# Altium PCB USBDM_Kinetis.PcbDoc
Units mil, origin at the board's own origin, x right, y up, seen from the top; angles counter-clockwise.
Board outline 2207.01 x 748.03 mil, 2 copper layers (Top Layer, Bottom Layer); 59 components, 62 nets, 241 pads, 104 vias.
Unrouted connection lines stored in the file: 19.
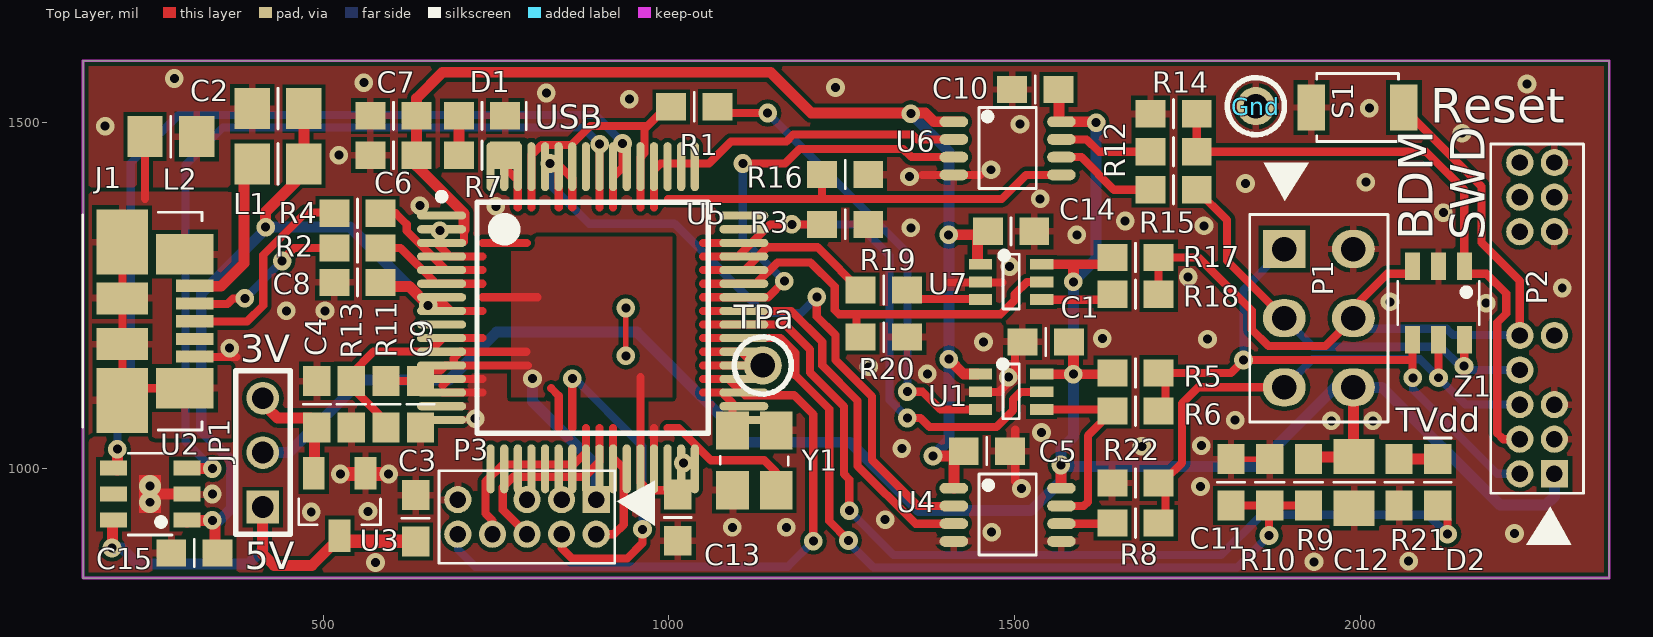
[diagram p0: Top Layer view]
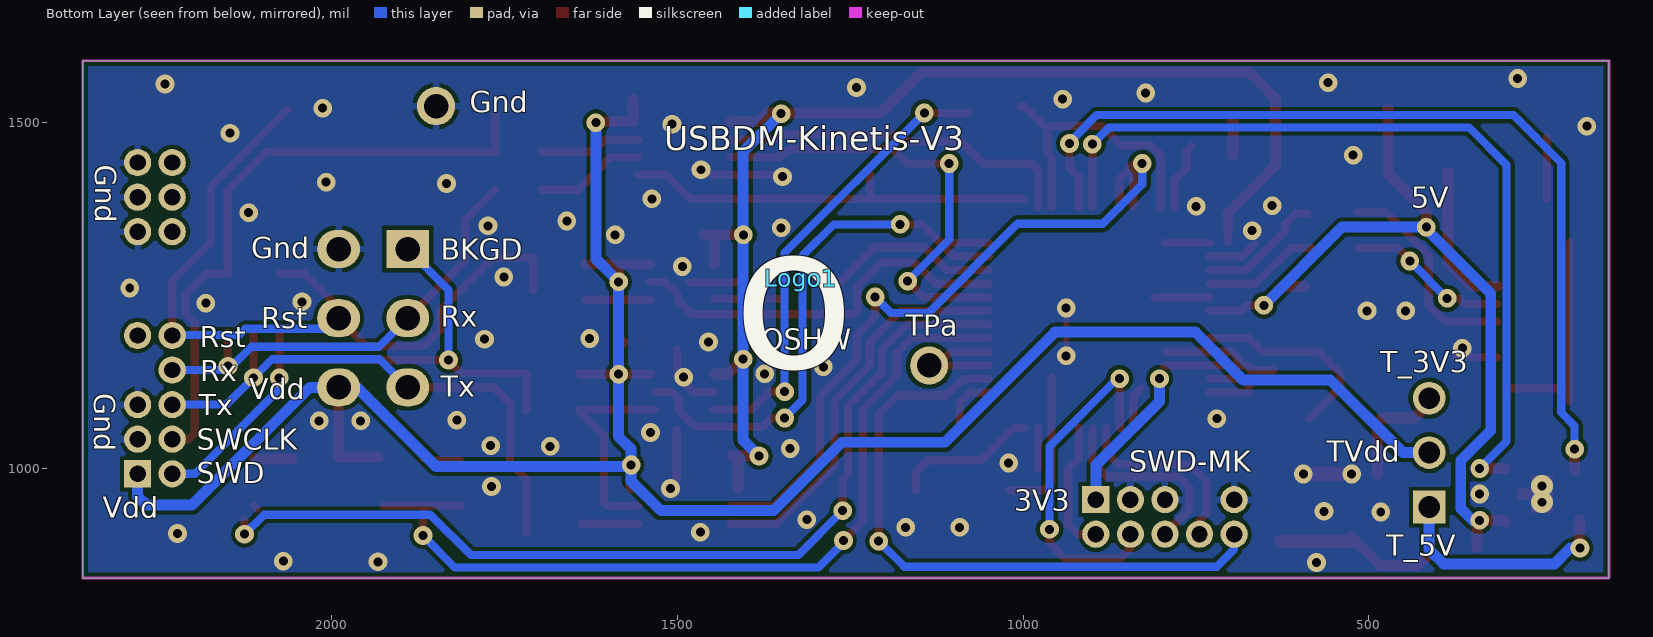
[diagram p1: Bottom Layer view, seen from below]
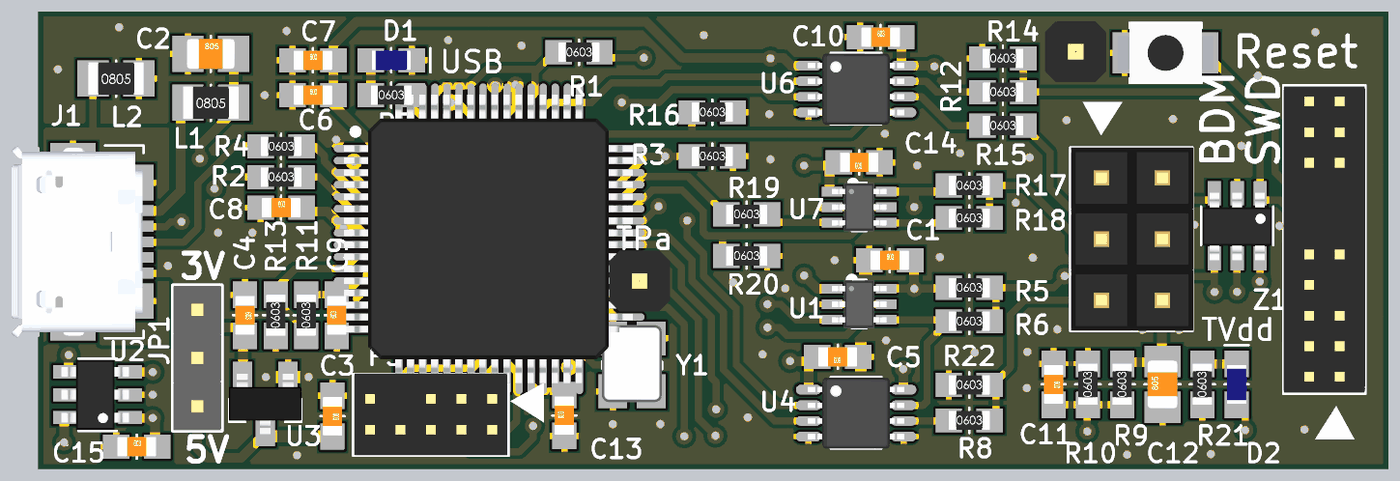
[diagram p2: 3D render of the assembled board from above, using the file's embedded part models]

## Layer stack, top to bottom
Top Solder: solder mask 0.4, Solder Resist, Dk 3.5
Top Layer: signal copper 1.4
Dielectric 1: dielectric 12.6, FR-4, Dk 4.8
Bottom Layer: signal copper 1.4
Bottom Solder: solder mask 0.4, Solder Resist, Dk 3.5

## Board outline
152.99,841.62 2360,841.62 2360,1589.65 152.99,1589.65

## Design rules (kind name [scope] priority, off if disabled: settings)
AssemblyTestPointUsage SilkToBoardRegionClearance_1 [All] p2:
AssemblyTestPointUsage SilkToBoardRegionClearance [All] p3:
Clearance [All] p1: gap=6
HoleSize [All] p1: absolutevalues=TRUE maxlimit=250 minlimit=13 maxpercent=80.000 minpercent=20.000
MatchedLengths DiffPair_DIFF100MatchedLengths [InDifferentialPairClass('DIFF100')] p1: tolerance=6 checknetsindiffpair=TRUE checkdiffpairvsdiffpair=FALSE checkothers=FALSE
MinimumAnnularRing [All] p1: minimumring=7
MinimumSolderMaskSliver [All] p1 off: minsoldermaskwidth=3.94
MinimumSolderMaskSliver SilkscreenOverComponentPads_2 [All] p2 off: minsoldermaskwidth=10
MinimumSolderMaskSliver SilkToSolderMaskClearance_1 [IsPad] p3 off: minsoldermaskwidth=10
MinimumSolderMaskSliver SilkscreenOverComponentPads_1 [All] p4 off: minsoldermaskwidth=10
MinimumSolderMaskSliver SilkToSolderMaskClearance [IsPad] p5 off: minsoldermaskwidth=10
MinimumSolderMaskSliver SilkscreenOverComponentPads [All] p6 off: minsoldermaskwidth=10
PlaneClearance [All] p1: clearance=10
PlaneConnect [All] p1: planeconnectstyle=Relief reliefexpansion=20 reliefentries=4 reliefconductorwidth=10 reliefairgap=6
PolygonConnect PolygonConnect_Via [IsVia] p1: connectstyle=Direct reliefconductorwidth=10 reliefentries=4 polygonreliefangle="90 Angle" airgapwidth=10
PolygonConnect [All] p2: connectstyle=Relief reliefconductorwidth=10 reliefentries=4 polygonreliefangle="90 Angle" airgapwidth=6
RoomDefinition USBDM_Kinetis [InComponentClass('USBDM_Kinetis')] p1: confinementstyle=ConfineIn formatcopy=TRUE lockcomponents=FALSE outline 100,700 2500,700 2500,1700 100,1700
RoutingVias [All] p1: holewidth=12 width=25 viastyle="Through Hole" minholewidth=12 minwidth=25 maxholewidth=28 maxwidth=50
SilkToBoardRegionClearance SilkToBoardRegionClearance_2 [All] p1 off:
SilkToSilkClearance [All] p1 off: silktosilkclearance=10
SilkToSolderMaskClearance SilkToSolderMaskClearance_2 [IsPad] p1 off: minsilkscreentomaskgap=10 clearancetoexposedcopper=TRUE
SolderMaskExpansion [All] p1: expansion=4
Width [All] p1: maxlimit=100 minlimit=6 preferedwidth=10
23 further rules are at their usual default settings.

## Components (designator, comment, footprint, x,y, rotation, side; value= is the part's Value field where it differs from the comment)
C1 "100nF" CCNP1608-0603 1545,1183 r0 top
C2 "10uF/10V" CCNP2012-0805 435,1520.46 r0 top
C3 "1uF" CCNP1608-0603 634,928 r270 top
C4 "4u7/6V" CCNP1608-0603 491,1093 r270 top
C5 "100nF" CCNP1608-0603 1460,1025 r180 top
C6 "2u2F" CCNP1608-0603 602,1453 r0 top
C7 "100nF" CCNP1608-0603 602,1510 r0 top
C8 "100nF" CCNP1608-0603 550,1269 r0 top
C9 "100nF" CCNP1608-0603 641,1093 r90 top
C10 "100nF" CCNP1608-0603 1530,1548 r0 top
C11 "100nF" CCNP1608-0603 1813,980 r270 top
C12 "4u7F/16V" CCNP2012-0805 1991,980 r90 top
C13 "100nF" CCNP1608-0603 1013,929 r90 top
C14 "100nF" CCNP1608-0603 1495,1343 r180 top
C15 "1uF" CCNP1608-0603 314,878 r0 top
D1 "LED Green" CD1608-0603 730,1510 r0 top
D2 "LED Red" CD1608-0603 2112,980 r90 top
Gnd "TP" "PCBPIN - 0.9mm" 1849,1524 r0 top
J1 "USB_MICRO_B_CONNECTOR" "MOLEX - 47346-0001" 262,1213 r0 top
JP1 "Header 1x3 2mm" "HEADER 1X3 (2MM)" 413,1023 r180 top
L1 "FB" CR2012-0805 435,1440.46 r0 top
L2 "FB" CR2012-0805 280,1480 r0 top
Logo1 "OSHW Logo" OSHW 1322,1275 r180 bottom
P1 "BDM2X3" BDM 1890,1317.37 r270 top
P2 "SWD-2x10" "SWD-2X10 - REDUCED" 2280.63,992.37 r90 top
P3 "SWD2X5" SWD-2X5 895,955 r180 top
R1 "1K" CR1608-0603 1037,1523 r0 top
R2 "33R" CR1608-0603 550,1319 r0 top
R3 "2K2" CR1608-0603 1255,1353 r0 top
R4 "33R" CR1608-0603 550,1369 r0 top
R5 "100K" CR1608-0603 1675,1138 r0 top
R6 "47R" CR1608-0603 1675,1083 r0 top
R7 "470R" CR1608-0603 730,1453 r0 top
R8 "47R" CR1608-0603 1675,921 r0 top
R9 "10K" CR1608-0603 1925,980 r90 top
R10 "10K" CR1608-0603 1869,980 r90 top
R11 "100K" CR1608-0603 591,1093 r90 top
R12 "47R" CR1608-0603 1730,1458 r0 top
R13 "0R" CR1608-0603 541,1093 r90 top
R14 "100K" CR1608-0603 1730,1513 r0 top
R15 "47R" CR1608-0603 1730,1403 r0 top
R16 "2K2" CR1608-0603 1255,1425 r0 top
R17 "100K" CR1608-0603 1675,1305.01 r0 top
R18 "47R" CR1608-0603 1675,1252 r0 top
R19 "1K" CR1608-0603 1311,1258 r0 top
R20 "2K2" CR1608-0603 1311,1190 r0 top
R21 "470R" CR1608-0603 2056,980 r90 top
R22 "100K" CR1608-0603 1675,979 r0 top
S1 "SW-PB-SMT-B3U" SW_SMT_PB2-B3U 1996,1522 r0 top
TPa "TP" "PCBPIN - 0.9mm" 1136,1149 r0 top
U1 "74LVC1T45DCK" SC70_N 1495,1111 r0 top
U2 "MIC2005-0.5YM6-TR" SOT23-6-Power 250,963 r90 top
U3 "MCP1703T-3302E/CB" SOT23 524,948 r180 top
U4 "74LVC2T45DCT" SSOP8_N 1490,933 r0 top
U5 "MK22FN1M0VLH12" TSQFP50P1200X1200-64N 890,1218 r0 top
U6 "74LVC2T45DCT" SSOP8_N 1490,1463 r0 top
U7 "74LVC1T45DCK" SC70_N 1495,1269.72 r0 top
Y1 "XTAL_SMT2_FA-238" "CRYSTAL_SMT - EPSON-FA-238" 1123.75,1011.87 r90 top
Z1 "82402305" SOT23-6 2113,1239.22 r180 top

## Footprints (in the part's own frame and the unit in brackets; to place one, negate y for a bottom-side part, rotate by r counter-clockwise, add the part's x,y. Pads: shape width x height; smd on the part's side, far side on the other; paste and mask are expansions set on the pad)
BDM [mil] "HCS12 style BDM connector"
  rect 55x62 hole 35.43: 1(0,0)
  oval 55x62 hole 35.43: 2(0,100) 3(100,0) 4(100,100) 5(200,0) 6(200,100)
  silkscreen extent -124,-50 250,150, body extent -50,-49 250,151, height 333
CCNP1608-0603 [mm]
  rect 1.1x1 smd: 1(-0.85,0) 2(0.85,0)
  silkscreen extent 0,-0.5 0,0.5, body extent -0.8,-0.4 0.8,0.4, height 0.3
CCNP2012-0805 [mm]
  rect 1.3x1.5 smd: 1(-0.95,0) 2(0.95,0)
  silkscreen extent 0,-0.75 0,0.75, body extent -1,-0.62 1,0.63, height 0.78
CD1608-0603 [mm]
  rect 1.1x1 smd: A(-0.85,0) K(0.85,0)
  silkscreen extent 0,-0.5 1.62,0.5, body extent -0.8,-0.4 0.8,0.4, height 0.8
CR1608-0603 [mm]
  rect 1.1x1 smd: 1(-0.85,0) 2(0.85,0)
  silkscreen extent 0,-0.53 0,0.53, body extent -0.85,-0.4 0.85,0.4, height 0.56
CR2012-0805 [mm]
  rect 1.3x1.5 smd: 1(-0.95,0) 2(0.95,0)
  silkscreen extent 0,-0.75 0,0.75, body extent -1.15,-0.67 1.15,0.68, height 0.76
"CRYSTAL_SMT - EPSON-FA-238" [mm] "Crystal SMT low profile 3.2 x 2.5"
  rect 1.4x1.2 smd: 1(-1.1,-0.8) 2(1.1,-0.8) 3(1.1,0.8) 4(-1.1,0.8)
  silkscreen extent -0.17,-1.25 0.15,1.25, body extent -1.55,-1.24 1.65,1.26, height 0.7
"HEADER 1X3 (2MM)" [mm]
  rect 1.2x1.2 hole 0.8: 1(0,2)
  round 1.2 hole 0.8: 2(0,0) 3(0,-2)
  silkscreen extent -1,-3 1,3, body extent -1,-3 1,3, height 5
"MOLEX - 47346-0001" [mm] "RECEPTACLE, MICRO USB B, BOTTOM MOUNT"
  rect 1.38x0.45 smd: D+(1.33,0) D-(1.33,0.65) G(1.33,-1.3) ID(1.33,-0.65) Vbus(1.33,1.3)
  rect 1.9x2.38 smd: S1(-1.33,2.91) S4(-1.33,-2.91)
  rect 1.9x1.18 smd: S2(-1.33,0.838) S3(-1.33,-0.838)
  rect 2.1x1.48 smd: S5(0.97,2.46) S6(0.97,-2.46)
  silkscreen extent -2.78,-4 1.6,4, body extent -3.88,-3.99 1.55,3.99, height 2.67
OSHW [mil] "OSHW Logo"
"PCBPIN - 0.9mm" [mm]
  round 1.4 hole 0.9: 1(0,0)
  silkscreen extent -1.05,-1.05 1.05,1.05, body extent -1.27,-1.27 1.27,1.27, height 6
SC70_N [mm] "SC70, 6-Leads, Body 2.15x1.4mm, Pitch 0.65mm, IPC Medium Density"
  rect 0.85x0.4 smd: 1(-1.125,0.65) 2(-1.125,0) 3(-1.125,-0.65) 4(1.125,-0.65) 5(1.125,0) 6(1.125,0.65)
  silkscreen extent -0.43,-0.99 0.3,1.14, body extent -1.14,-1 1.14,1, height 1.1
SOT23 [mm] "SOT-23; 3 Leads; Body 3.0 x 2.3 mm, inc. leads (LxW max)"
  rect 0.8x1.2 smd: 1(-0.95,-1.15) 2(0.95,-1.15) 3(0,1.15)
  silkscreen extent -1.5,-0.2 1.5,0.75, body extent -1.5,-1.25 1.5,1.25, height 1.05
SOT23-6 [mm] "SOT-23; 6 Leads; Body 3.0 x 2.3 mm, inc. leads (LxW max)"
  rect 0.55x1 smd: 1(-0.95,-1.35) 2(0,-1.35) 3(0.95,-1.35) 4(0.95,1.35) 5(0,1.35) 6(-0.95,1.35)
  silkscreen extent -1.5,-0.8 1.5,0.8, body extent -1.45,-1.37 1.45,1.43, height 1.45
SOT23-6-Power [mm]
  rect 0.55x1 smd: 1(-0.95,-1.35) 2(0,-1.35) 3(0.95,-1.35) 4(0.95,1.35) 5(0,1.35) 6(-0.95,1.35)
  Top Layer region: 0.7,-0.4 0.7,0.4 -0.7,0.4 -0.7,-0.4
  Top Layer region: -0.2,-0.9 0.2,-0.9 0.2,0.1 -0.2,0.1
  silkscreen extent -1.5,-0.8 1.5,0.8, body extent -1.45,-1.3 1.45,1.5, height 1.45
SSOP8_N [mm] "SSOP, 8-Leads, Body 2.9x3.2mm, Pitch 0.65mm, IPC Medium Density"
  oval 1.05x0.4 smd: 1(-1.975,0.975) 2(-1.975,0.325) 3(-1.975,-0.325) 4(-1.975,-0.975) 5(1.975,-0.975) 6(1.975,-0.325) 7(1.975,0.325) 8(1.975,0.975)
  silkscreen extent -1.05,-1.47 1.05,1.5, body extent -2.01,-1.47 2.01,1.48, height 1.3
SW_SMT_PB2-B3U [mm] "Miniature SMT Push Button"
  rect 1x1.7 smd: 1(-1.7,0) 2(1.7,0)
  silkscreen extent -1.5,-1.25 1.5,1.25, body extent -2,-1.25 2,1.25, height 1.6
SWD-2X5 [mm] "Connector; SWD; 2x5 Position"
  rect 1x1 hole 0.6: 1(0,0)
  round 1 hole 0.6: 2(0,1.27) 3(1.27,0) 4(1.27,1.27) 5(2.54,0) 6(2.54,1.27) 8(3.81,1.27) 9(5.08,0) 10(5.08,1.27)
  silkscreen extent -2.15,-1.06 5.77,2.33, body extent -0.63,-1.09 5.72,2.31, height 4.5
"SWD-2X10 - REDUCED" [mm] "Connector; SWD; 2x10 Position"
  rect 1x1 hole 0.6: 1(0,0)
  round 1 hole 0.6: 2(0,1.27) 3(1.27,0) 4(1.27,1.27) 5(2.54,0) 6(2.54,1.27) 8(3.81,1.27) 9(5.08,0) 10(5.08,1.27) 15(8.89,0) 16(8.89,1.27) 17(10.16,0) 18(10.16,1.27) 19(11.43,0) 20(11.43,1.27)
  silkscreen extent -2.6,-1.07 12.12,2.34, body extent -0.64,-1.06 12.06,2.34, height 4.5
TSQFP50P1200X1200-64N [mm] "Thin QFP, 64-Leads, Body 10x10mm, Pitch 0.5mm, IPC Medium Density"
  oval 1.8x0.3 smd: 1(-5.55,3.75) 2(-5.55,3.25) 3(-5.55,2.75) 4(-5.55,2.25) 5(-5.55,1.75) 6(-5.55,1.25) 7(-5.55,0.75) 8(-5.55,0.25) 9(-5.55,-0.25) 10(-5.55,-0.75) 11(-5.55,-1.25) 12(-5.55,-1.75) 13(-5.55,-2.25) 14(-5.55,-2.75) 15(-5.55,-3.25) 16(-5.55,-3.75) 33(5.55,-3.75) 34(5.55,-3.25) 35(5.55,-2.75) 36(5.55,-2.25) 37(5.55,-1.75) 38(5.55,-1.25) 39(5.55,-0.75) 40(5.55,-0.25) 41(5.55,0.25) 42(5.55,0.75) 43(5.55,1.25) 44(5.55,1.75) 45(5.55,2.25) 46(5.55,2.75) 47(5.55,3.25) 48(5.55,3.75)
  oval 0.3x1.8 smd: 17(-3.75,-5.55) 18(-3.25,-5.55) 19(-2.75,-5.55) 20(-2.25,-5.55) 21(-1.75,-5.55) 22(-1.25,-5.55) 23(-0.75,-5.55) 24(-0.25,-5.55) 25(0.25,-5.55) 26(0.75,-5.55) 27(1.25,-5.55) 28(1.75,-5.55) 29(2.25,-5.55) 30(2.75,-5.55) 31(3.25,-5.55) 32(3.75,-5.55) 49(3.75,5.55) 50(3.25,5.55) 51(2.75,5.55) 52(2.25,5.55) 53(1.75,5.55) 54(1.25,5.55) 55(0.75,5.55) 56(0.25,5.55) 57(-0.25,5.55) 58(-0.75,5.55) 59(-1.25,5.55) 60(-1.75,5.55) 61(-2.25,5.55) 62(-2.75,5.55) 63(-3.25,5.55) 64(-3.75,5.55)
  silkscreen extent -5.67,-4.25 4.25,4.57, body extent -6.02,-6 5.98,6, height 1.6

## Part data
C1 C5 C7 C8 C9 C10 C11 C13 C14: library part Cap, "Capacitor"
C2 C12: library part Cap_CCNP_0805, "Capacitor SMT 0805"
C3 C15: library part Cap, "Capacitor SMT"
C4 C6: library part Cap_CCNP_0603, "Capacitor SMT 0603"
D1 D2: library part "LED SMT,Red-0603", "LED (Red 0603)"
Gnd TPa: "Test Point"
J1: "USB Micro-B Connector"
JP1: "Header, 1x3, 2mm"
L1 L2: library part "Ferrite Bead 0805", "Ferrite Bead (0805) 0.045OHM, 2A"
P2: library part SWD2X10-Reduced, "SWD Connector 2x10-Pin"
P3: "SWD Connector 2x5-Pin"
R1 R3 R5 R6 R7 R8 R9 R10 R12 R14 R15 R16 R17 R18 R19 R20 R21 R22: library part Res, "Resistor SMT"
R2 R4: library part Res, "Resistor"
R11 R13: library part Res_CR0603, "Resistor"
S1: "Switch OMRON B3U series"
U1 U4 U6 U7: "Dual voltage bidirection buffer"
U2: "Power Switch"
U3: "3V3 LDO regulator"
U5: "Arm Cortex M4F"
Y1: "Crystal (EPSON  Q22FA23800065 FA-238 24 MHZ 12.0PF)"
Z1: "Quintuple Unipolar Protection Device (5V)"

## Via types
v1: diameter 27, hole 13, Top Layer to Bottom Layer, tented both sides, 101 vias
v2: diameter 31.5, hole 13, Top Layer to Bottom Layer, tented both sides, 2 vias
v3: diameter 27, hole 13, Top Layer to Bottom Layer, tented top, 1 vias

## Nets (pads, with @x,y where several pads share a name; then routed paths per layer and width w, separated by ;. In a path a pad name is that pad's centre, name@x,y a point inside that pad or via, vN(x,y) a via of type N, cw(c..) or ccw(c..) an arc to the next point about the centre after c; other vN are vias at no path point)
3V3: C5.2 C6.2 C7.2 C9.2 C13.2 C14.2 P3.1 R11.2 U1.1 U4.1 U5.3 U5.7 U5.13 U5.14 U5.21 U5.30 U6.1 U7.1 | length 2666.6
  Top Layer w11.81: R11.2 C9.2 ; C9.2@638,1142 670,1142 677.1,1149.1 689.1,1149.1 ; U5.3@704,1328 704,1345 ; 730.55,1247.53 810,1247.53 ; 794,1168.79 698.79,1168.79 689.1,1159.1 689.1,1149.1 ; 796.1,1149.1 730.55,1149.1 689.1,1149.1 ; 958.9,1131.9 958.9,1058.55 958.9,979.86 970.29,968.47 C13.2@1020.68,968.47
  Top Layer w15.75: 704,1345 704,1369 635.46,1437.54 C6.2 C7.2 635.46,1535.46 673,1573 1147,1573 1206,1514 1370.91,1514 1383.52,1501.39 U6.1@1423.07,1501.39 ; v1(1382,1018) C5.2@1421.54,1018 ; v1@1404.85,1338 C14.2@1461.54,1338 ; v1(1405,1158) 1426.61,1136.39 U1.1@1446.69,1136.39 ; U4.1 C5.2@1412.24,1016.46 ; U7.1@1446.69,1296.39 C14.2@1446.69,1334
  Bottom Layer w15.75: v1(803,1130) 803,1097 895,1005 P3.1 ; v1(1350,1513) 1405,1458 v1(1405,1158) 1405,1041 v1(1382,1018)
  other v1: 1404.85,1337.85
5V: C2.2 C8.2 C15.2 L1.2 U2.1 U5.8 | length 1204
  Top Layer w11.81: v1(652,1236) 677,1236 685.16,1227.84 730.55,1227.84
  Top Layer w15.75: U2.1@303.15,922.6 305.55,925 v1(340,925) 341.28,925 343.68,922.6 C15.2@343.68,885.79 ; v3(417,1349) 417,1371 472.4,1426.4 L1.2 C2.2 ; C8.2@593.46,1263 625,1263 v1(652,1236)
  Bottom Layer w15.75: v1(340,925) 350,925 367.37,942.37 367.37,1011.34 324,1054.71 324,1253 v3@418.5,1347.5 ; v3(417,1349) 539,1349 v1(652,1236)
ADC0_DP0: U5.9
ADC1_DP0: U5.11 U5.12
BKGD/SWD_DIR: R3.1 U1.5 U5.45 U5.46 | length 891.3
  Top Layer w11.81: 1049.45,1306.58 1100.21,1306.58 U5.46@1119.89,1326.27 ; 1049.45,1326.27 U5.46@1119.89,1326.27 ; R3.1 1146.62,1353 U5.46@1119.89,1326.27 ; v1(1345,1073) 1363.95,1073 1377,1059.95 1473.95,1059.95 1497.64,1083.64 1497.64,1099.63 1508.81,1110.8 U1.5@1533.31,1110.8
  Bottom Layer w11.81: v1(1178,1353) 1274,1353 1319,1308 1319,1099 v1(1345,1073)
BKGD/SWD_I: U4.2 U5.60 U5.61 | length 1060
  Top Layer w11.81: 840.79,1377.45 840.79,1439.21 860.47,1419.53 860.47,1377.45 ; v1(1214,1248) 1214,1220 1241,1193 1241,1157 1294,1104 1294,1012 1360.2,945.8 U4.2@1423.07,945.8
  Bottom Layer w11.81: v1(828,1441) 828,1410.83 884.83,1354 1008,1354 1137,1225 1191,1225 v1(1214,1248)
BKGD/SWD_O: R1.1 U5.51 U5.63 | length 429.2
  Top Layer w11.81: 801.42,1377.45 801.42,1453.42 816,1468 859,1468 886.41,1495.41 969.3,1495.41 ; 958.9,1377.45 958.9,1449.9 965,1456 965,1491.1 996.9,1523 R1.1
DAC_OUT: U5.18
DBG_RX: U4.3 U5.39 | length 576.1
  Top Layer w11.81: 1049.45,1227.84 1177.16,1227.84 1222,1183 1222,1149 1273,1098 1273,1003.83 1356.63,920.2 U4.3@1423.07,920.2
DBG_TX: U5.40 U6.3 | length 651.8
  Top Layer w11.81: 1049.45,1247.53 1143.53,1247.53 v1(1167,1271) ; v1(1107,1441) 1168,1441 1189,1462 1339,1462 1350.8,1450.2 U6.3 U6.3@1423.07,1450.2
  Bottom Layer w11.81: v1(1107,1441) 1107,1331 v1(1167,1271)
EXTAL: U5.33 Y1.3 | length 82.5
  Top Layer w11.81: 1049.45,1109.73 1077.27,1109.73 1092.25,1094.75 Y1.3@1092.25,1061.28
EXTAL32: U5.20
GND: C1.1 C2.1 C3.1 C4.1 C5.1 C6.1 C7.1 C8.1 C9.1 C10.1 C11.1 C12.1 C13.1 C14.1 C15.1 D1.K Gnd.1 J1.G L2.2 P1.2 P2.3 P2.5 P2.15 P2.17 P2.19 P3.3 P3.5 P3.9 R3.2 R10.2 R13.1 R14.1 R16.2 R20.2 R21.1 R22.1 S1.1 U1.2 U2.2 U3.1 U4.4 U4.5 U5.4 U5.15 U5.16 U5.31 U6.4 U7.2 Y1.2 Y1.4 Z1.2 | length 840.1
  Top Layer w7.87: v1(938,1163) v1(938,1232) ; C11.1 R10.2
  Top Layer w11.81: J1.G@314.72,1161.19 375,1161.19 ; 666,1324 683.42,1306.58 730.55,1306.58 ; 673,1120 677.19,1124.19 677.38,1124.19 682.61,1129.42 730.55,1129.42 ; 673.73,1109.73 730.55,1109.73 ; 978.58,1000 978.58,1058.55 ; 1366.61,1424.61 1451,1424.61 ; 1405.02,1269.08 1482.82,1269.08 ; U1.2@1446.69,1110.8 1477.8,1110.8 1500.72,1133.72 1500.72,1144.2 ; 1500.74,1144.22 C1.1@1500.74,1172.2 ; v1@1501,981 1501,1056
  Top Layer w19.68: v1(525,992) v1@592,992
  other v1: 576,864 1933,865 2070,866 2223,906 1467,908 1092,915 1170,915 1313,926 483,937 565,938 340,963 1510,971 1769,974 595,992 1021,1008 1337,1029 1684,1032 1770,1033 1539,1052 1958,1069 2018,1069 1819,1070 720,1072 1491,1132 1374,1137 1289,1147 365,1174 1455,1183 1779,1187 1627,1188 447,1228 503,1228 2182,1239 2043,1241 2292,1261 1751,1277 1493,1292 1590,1338 669,1344 1350,1348 1774,1351 1660,1358 2120,1370 750,1379 640,1380 1537,1390 1834,1412 2008,1414 1348,1422 1466,1432 523,1453 2147,1485 185,1495 1508,1498 2013,1521 943,1534 823,1543 1241,1551 2241,1556 559,1558 285,1564
  other v2: 250,951.19 250,974.81
ID: R11.1 R13.2 U5.10 | length 294.6
  Top Layer w11.81: R11.1@586.56,1072.15 541,1117.71 R13.2 541,1137 573,1169 654.06,1169 673.53,1188.47 730.55,1188.47
LED: D2.A U5.38 | length 1380.1
  Top Layer w11.81: 1049.45,1208.16 1167.84,1208.16 1204,1172 1204,1139 1253.19,1089.81 1253.19,991.81 1261,984 v1(1261,939) ; D2.A@2108,942.54 D2.A ; v1(2126,905) D2.A@2126,926
  Bottom Layer w11.81: v1(1261,939) 1325.19,874.81 1798.81,874.81 1857,933 2098,933 v1(2126,905)
NetD1_A: D1.A R7.1 | length 57
  Top Layer w15.75: R7.1 D1.A
NetD2_K: D2.K R21.2 | length 56
  Top Layer w15.75: R21.2 D2.K
NetJ1_D+: J1.D+ R4.1 | length 309.8
  Top Layer w11.81: J1.D+@314.72,1212.37 390.37,1212.37 413.59,1235.59 413.59,1308.52 475.07,1370 R4.1@516.54,1370
NetJ1_D-: J1.D- R2.1 | length 239.4
  Top Layer w11.81: J1.D-@314.72,1237.96 362,1237.96 370.04,1246 v1(387,1246) ; v1(441,1300) 439,1300 458,1319 R2.1
  Bottom Layer w11.81: v1(387,1246) v1(441,1300)
NetJ1_VBUS: J1.Vbus L1.1 | length 217.1
  Top Layer w15.75: J1.Vbus@314.72,1263.55 352.7,1263.55 378,1288.85 386,1296.85 L1.1@386,1428.87
NetR1_2: R1.2 U1.3 | length 662.6
  Top Layer w11.81: R1.2@1079.46,1514 v1(1143,1514) ; v1(1345,1111) 1367,1111 1392.8,1085.2 U1.3@1446.69,1085.2
  Bottom Layer w11.81: v1(1143,1514) 1345,1312 v1(1345,1111)
NetR6_1: R6.1 U1.4 U4.7 | length 305.7
  Top Layer w11.81: U1.4@1533.31,1085.2 R6.1@1641.54,1085.2 ; U4.7@1556.93,945.8 1600,945.8 1606,951.8 1606,1047.46 R6.1
NetR8_1: R8.1 U4.6 | length 82.4
  Top Layer w11.81: U4.6@1556.93,920.2 R8.1@1639.33,920.2
NetR12_1: R12.1 U6.7 | length 147
  Top Layer w11.81: U6.7@1556.93,1475.8 1604.2,1475.8 1622,1458 R12.1
NetR15_1: R15.1 U6.6 | length 159.2
  Top Layer w11.81: U6.6@1556.93,1450.2 1596.8,1450.2 1644,1403 R15.1
NetR18_1: R18.1 U7.4 | length 94.4
  Top Layer w11.81: U7.4 R18.1@1633.66,1244.13
NetR19_2: R19.2 U7.3 | length 101.7
  Top Layer w11.81: R19.2@1345,1245.2 U7.3@1446.69,1245.2
PTA4: U5.26
PTA5: U5.27
PTA12: U5.28
PTA13: U5.29
PTC7: U5.52
PTD2: U5.59
PTD5: U5.62
RESETB: P3.10 U5.34 | length 925.5
  Top Layer w11.81: 1049.45,1129.42 1086.58,1129.42 1110,1106 1181,1106 1209,1078 v1(1209,895)
  Bottom Layer w11.81: P3.10 695,883 720,858 1172,858 v1(1209,895)
RST_DIR: R20.1 U5.43 U7.5 | length 606.6
  Top Layer w11.81: 1049.45,1267.21 1126.21,1267.21 1157,1298 1205,1298 1240,1263 1240,1229 1246,1223 1479.87,1223 1500,1243.13 1500,1252 1517.72,1269.72 U7.5 ; R20.1@1271.54,1193 1271.54,1221.46
RST_IO: R19.1 U5.44 | length 281.4
  Top Layer w11.81: 1049.45,1286.9 1109.9,1286.9 1143,1320 1215,1320 1281.06,1253.94 R19.1@1281.06,1245.2
SWCLK_O: U5.50 U6.2 | length 522.9
  Top Layer w11.81: 978.58,1377.45 978.58,1431.58 988,1441 1058,1441 1090,1473 1170,1473 1180,1483 1352.03,1483 1359.23,1475.8 U6.2 U6.2@1423.07,1475.8
SWD_CLK: P3.4 U5.22 | length 509.4
  Top Layer w11.81: P3.4 845,885 860,870 940,870 962,892 v1(962,912) ; 860.47,1058.55 v1(860.47,1130)
  Bottom Layer w11.81: v1@859,1135 962,1032 v1(962,912)
SWD_DIO: P3.2 U5.25 | length 191.7
  Top Layer w11.81: P3.2 920.86,905 935,919.14 935,1000 919.53,1015.47 919.53,1058.55
SWD_EN: R16.1 U5.49 U6.5 | length 607.4
  Top Layer w11.81: 999,1389.53 1481.53,1389.53 1516.61,1424.61 U6.5@1556.93,1424.61 ; 1221.54,1390.06 R16.1
SWD_RX: P3.8 U5.23 | length 277.9
  Top Layer w11.81: P3.8 745,925 735,935 735,981 760,1006 862.64,1006 880.16,1023.52 880.16,1058.55
SWD_TX: P3.6 U5.24 | length 286.3
  Top Layer w11.81: P3.6 760,940 760,973 775,988 878,988 899.84,1009.84 899.84,1058.55
T_BKGD/SWD: P1.1 P2.2 R5.2 R6.2 Z1.4 | length 891.4
  Top Layer w11.81: R6.2@1718.46,1083 1718.46,1138 1813,1138 1831.78,1156.78 2073.09,1156.78 2074,1155.86 ; v1@2075.6,1131 Z1.4@2075.6,1196.9
  Bottom Layer w11.81: v1(1831,1157) 1831,1258.37 P1.1 ; v1(2076,1131) 2076,1114 2197.63,992.37 P2.2
T_DBG_RX: P1.3 P2.8 R15.2 Z1.6 | length 648.9
  Top Layer w11.81: R15.2 1807,1359.46 1807,1300.37 P1.3 ; v1@2150.4,1152.22 Z1.6@2150.4,1196.9
  Bottom Layer w11.81: P1.3 1931.37,1176 2116,1176 2144,1148 v1(2150,1148) ; v1@2155.11,1147.11 2159.85,1142.37 P2.8
T_DBG_TX: P1.5 P2.6 R8.2 R22.2 Z1.5 | length 803.8
  Top Layer w11.81: R8.2@1718.46,908 1718.46,984.46 1742.02,1008.02 1742.02,1094.02 1765.37,1117.37 P1.5 ; v1(2113,1131.22) Z1.5@2113,1196.9
  Bottom Layer w11.81: P1.5 1930.63,1158 2086.22,1158 v1(2113,1131.22) 2151.85,1092.37 P2.6
T_RST: P1.4 P2.10 R17.2 R18.2 S1.2 Z1.3 | length 1183.9
  Top Layer w11.81: R18.2@1708.3,1258 1708.3,1305.01 R17.2 1766.23,1305.01 1843,1228.24 1843,1201 1867,1177 1949.63,1177 P1.4 1990,1233 2038.54,1281.54 Z1.3@2075.6,1281.54 ; S1.2@2062.93,1520.07 2175,1408 2175,1327 2230.63,1271.37 P2.10
  Bottom Layer w11.81: P1.4 2005.37,1202 2125,1202 2134,1193 2230,1193 P2.10
T_SWCLK: P2.4 R12.2 R14.2 Z1.1 | length 902
  Top Layer w11.81: R14.2 R12.2 2095,1458 2150.4,1402.6 2150.4,1281.54 2182.46,1281.54 2211,1253 2211,1224 2198,1211 2198,1050.99 2206.62,1042.37 P2.4
TPA: TPa.1 U5.35 U5.36 | length 157.1
  Top Layer w11.81: 1049.45,1149.1 1123.9,1149.1 1104.21,1168.79 1049.45,1168.79
USB_DM: R2.2 U5.6 | length 168.5
  Top Layer w11.81: R2.2 612,1319 663.79,1267.21 730.55,1267.21
USB_DP: R4.2 U5.5 | length 182
  Top Layer w11.81: R4.2@588,1369 605.17,1369 621,1353.17 621,1343.81 677.91,1286.9 730.55,1286.9
USB_LED: R7.2 U5.64 | length 99.5
  Top Layer w11.81: R7.2@756.54,1466.46 764.23,1458.77 764.23,1433.77 781.73,1416.27 781.73,1377.45
USB_SH: J1.S1 J1.S2 J1.S3 J1.S4 J1.S5 J1.S6 L2.1 | length 404.2
  Top Layer w11.81: J1.S4@210,1097.8 J1.S1@210,1326.94 ; J1.S4@215.15,1116.15 J1.S6 ; 242.6,1390 L2.1
VBDM: C11.2 R9.1 R10.1 U5.37 | length 1244.8
  Top Layer w11.81: 1049.45,1188.47 1161.53,1188.47 1183,1167 1183,1134.81 1232,1085.81 1232,924 v1(1260,896) ; C11.2 R10.1 R9.1 ; v1(1868,903) R10.1@1868,945.54
  Bottom Layer w11.81: v1(1260,896) 1260,893.07 1296.07,857 1822,857 v1(1868,903)
VDD_BDM: C1.2 C10.2 C12.2 JP1.2 P1.6 P2.1 R5.1 R9.2 R17.1 U1.6 U4.8 U6.8 U7.6 | length 3313.7
  Top Layer w13.78: U1.6 1585,1136.59 1640.13,1136.59 R5.1 ; U7.6 R17.1@1631.84,1295.31
  Top Layer w15.75: C10.2@1564.32,1533.85 1564.32,1501.39 1623.39,1501.39 1622,1500 v1(1618,1500) ; U4.8@1567,972.14 v1(1567,1005) ; C1.2 1585,1176.46 1585,1136.59 v1(1585,1136.39) ; v1(1585,1270) 1585,1291 ; R9.2@1932.94,1016.4 1990,1016.4 P1.6
  Bottom Layer w15.75: JP1.2@412.73,1008.86 JP1.2@413,1008.86 ; JP1.2 451,1023 556,1128 682,1128 751.13,1197.13 953.87,1197.13 1113,1038 1262,1038 1361,939 1524,939 1567,982 v1(1567,1005) ; v1@1585,1269 v1(1585,1136.39) 1585,1046 1567,1028 v1(1567,1005) ; v1(1585,1270) 1618,1303 v1(1618,1500) ; P2.1 2280.63,959.63 2268,947 2202,947 2031.63,1117.37 P1.6 1963.37,1117.37 1849,1003 1569,1003 v1(1567,1005)
VDD_EN: U2.3 U5.58 | length 1215
  Top Layer w11.81: v1@898,1469 v1(900,1469) ; 899.84,1377.45 v1@899.84,1467.16
  Top Layer w15.75: U2.3@303.15,1000 v1(340,1000)
  Bottom Layer w11.81: v1(340,1000) 301,1039 301,1439 355,1493 876,1493 v1(900,1469)
VDD_FLT: U2.4 U5.57 | length 1308.6
  Top Layer w11.81: 919.53,1377.45 919.53,1421.53 933,1435 v1(933,1470)
  Top Layer w15.75: U2.4@202.35,997.4 202.68,997.72 v1(202.68,1028)
  Bottom Layer w11.81: v1(202.68,1028) 202.68,1061.68 222,1081 222,1442 291,1511 893.93,1511 925.41,1479.52 925.41,1477.59 v1(933,1470)
VREFO: U5.17
VRIN: C3.2 JP1.1 U2.6 U3.3 | length 631.7
  Top Layer w15.75: v1(195,885) 195.71,885 U2.6@195.71,925.6 ; JP1.1@412.73,930.12 412.73,876.27 429,860 484.28,860 U3.3@525,900.72
  Top Layer w19.68: U3.3@525,894.72 C3.2@628.19,894.72
  Bottom Layer w15.75: v1(195,885) 209,885 232,862 392,862 413,883 JP1.1
VROUT: C4.2 JP1.3 U3.2 | length 146.9
  Top Layer w15.75: JP1.3@412.73,1087.6 420.13,1095 420.13,1086.87 434,1073 C4.2@481.54,1073 ; U3.2@487.6,991.28 C4.2@487.6,1052.4
XTAL: U5.32 Y1.1 | length 209.6
  Top Layer w11.81: 998.27,1058.55 1014.45,1058.55 1061.15,1011.85 1138.15,1011.85 1155.24,994.76 Y1.1
XTAL32: U5.19
pads on no net: J1.ID P2.9 P2.16 P2.18 P2.20 U2.5 U5.1 U5.2 U5.41 U5.42 U5.47 U5.48 U5.53 U5.54 U5.55 U5.56
copper on no net: | length 126.1
  Top Layer w11.81: 730.55,1326.27 794.73,1326.27 ; 830,1116 840.79,1105.21 840.79,1058.55

## Polygon pours and split planes (outlines as drawn)
USB_SH on Top Layer "Top Layer-No Net" (solid, remove dead copper, pour order 10): 160,1400 367.12,1400 367.12,1044 160,1044
GND on Top Layer "Top Layer-No Net" (solid, remove dead copper, pour order 8): 151,841.62 151,1589.65 2360,1589.65 2360,841.62
3V3 on Top Layer "Top Layer-No Net" (solid, pour order 6): 772.05,1335 1005,1335 1005,1102.84 772.05,1102.84
GND on Bottom Layer "Top Layer-No Net" (solid, remove dead copper, pour order 7): 153.58,1589.24 2359.58,1589.24 2359.58,841.21 153.58,841.2

## Keep-outs
Keep-Out Layer:
  the board outline again, w3.94

## Silkscreen, mask and mechanical layers (free items; w line width, h text height)
Top Overlay:
  text "Reset" at 2101,1500 h50
  text "USB" at 806,1491 h35
  text "BDM" at 2105,1330 h50 r90
  text "SWD" at 2180,1330 h50 r90
  text "3V" at 380,1154 h40
  text "TVdd" at 2051,1053 h35
  text "5V" at 387,854 h40
Bottom Overlay:
  text "Gnd" at 1800,1515 h30
  text "USBDM-Kinetis-V3" at 1519,1460 h35
  text "Gnd" at 2342,1439 h30 r90
  text "5V" at 439,1377 h30
  text "Gnd" at 2116,1304 h30
  text "BKGD" at 1842,1302 h30
  text "Rx" at 1842,1205 h30
  text "Rst" at 2102,1203 h30
  text "TPa" at 1170,1192 h30
  text "Rst" at 2191,1175 h30
  text "T_3V3" at 484,1139 h30
  text "Rx" at 2190,1126 h30
  text "Gnd" at 2343,1109 h30 r90
  text "Tx" at 1842,1104 h30
  text "Vdd" at 2119,1100 h30
  text "Tx" at 2192,1077 h30
  text "SWCLK" at 2195,1027 h30
  text "TVdd" at 561,1010 h30
  text "SWD-MK" at 847,995 h30
  text "SWD" at 2195,979 h30
  text "3V3" at 1013,939 h30
  text "Vdd" at 2331,929 h30
  text "T_5V" at 475,874 h30

## Dimensions
151,1589.65 to 2360,1589.65 on Mechanical 1
2360,841.62 to 2360,1589.65 on Mechanical 1

## Text inside footprints (layer, text, board x,y; h text height)
Logo1: Bottom Overlay "OSHW" at 1379,1172 h30; Bottom Overlay "o" at 1243,1069 h400